# EAGLE board master manual (EAGLE 8.4.0)
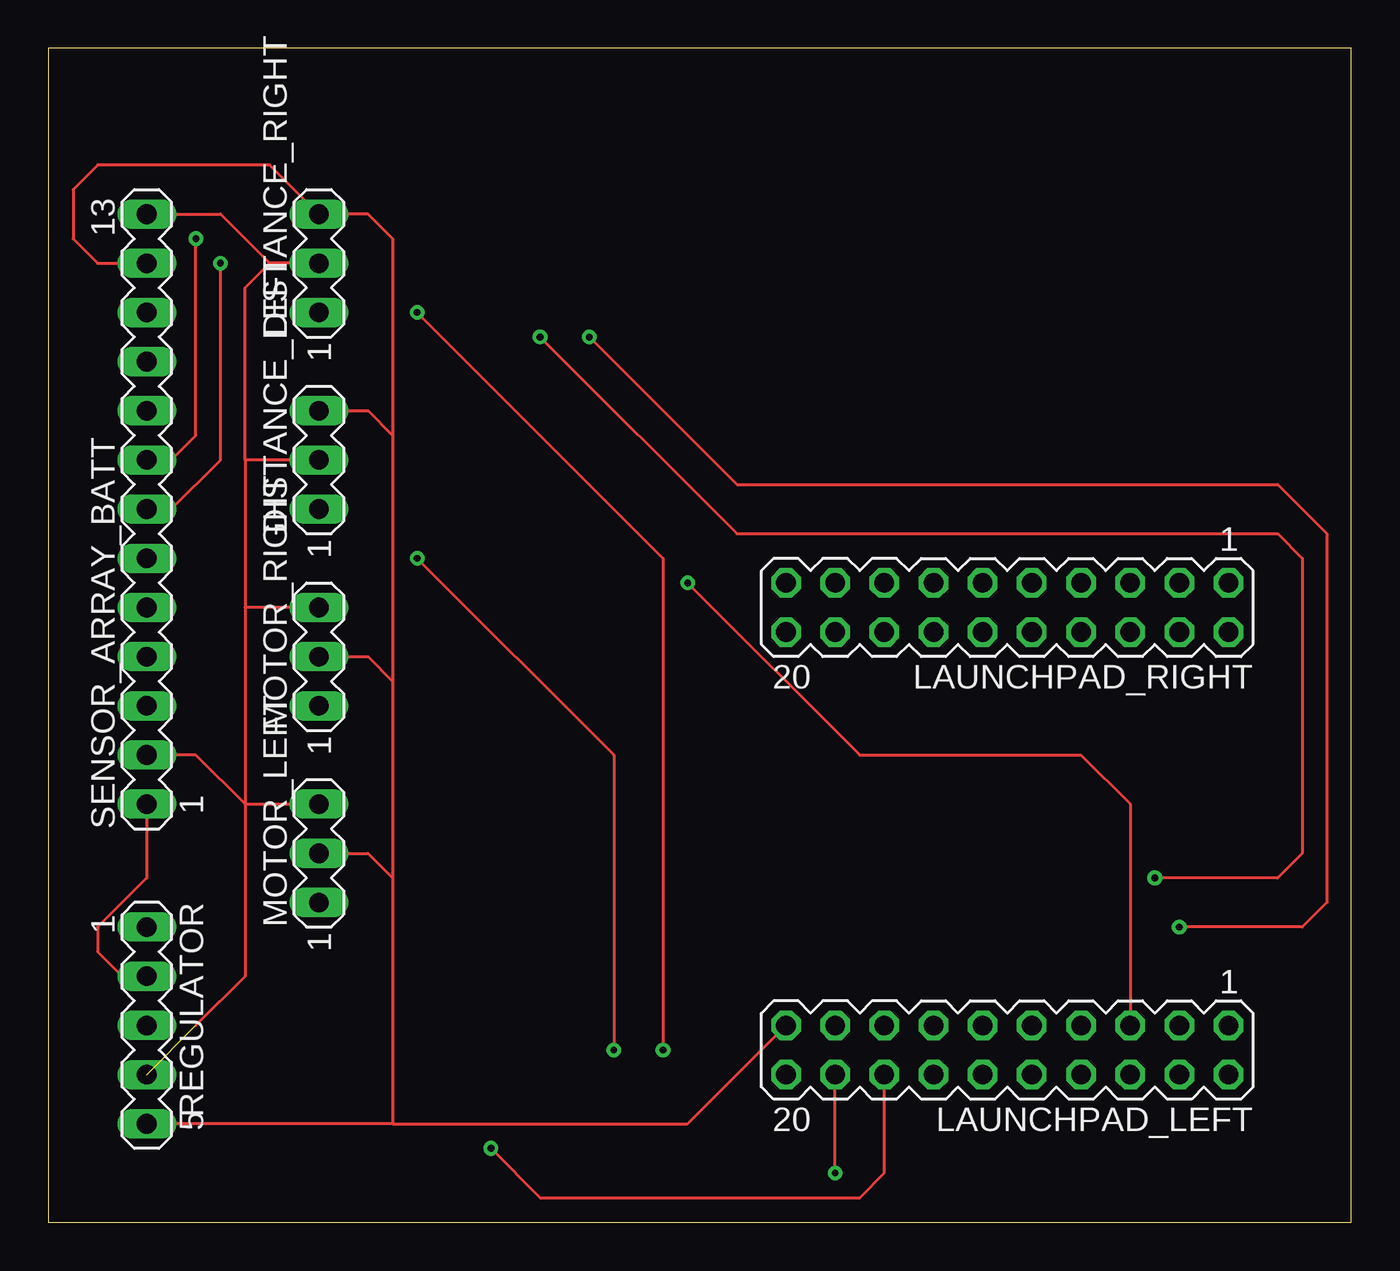
[diagram p0: board, top side]
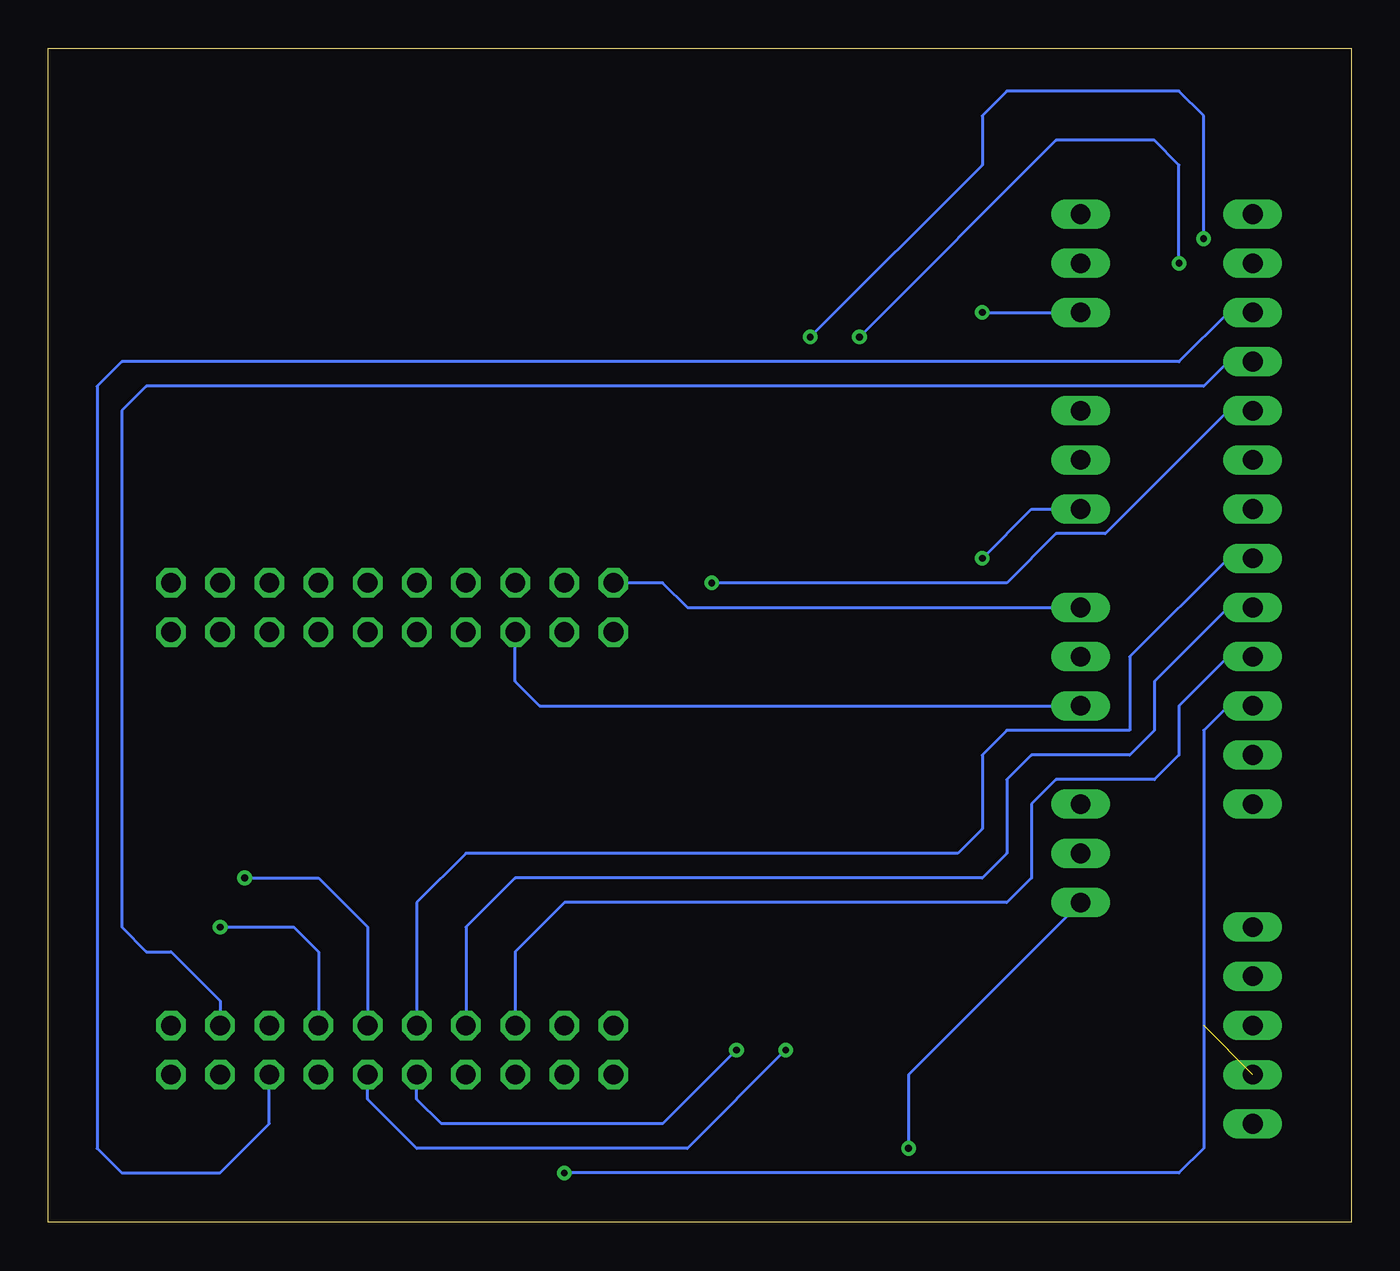
[diagram p1: board, bottom side, seen from below]

Size 67.29 x 60.63 mm. Coordinates in mm from the lower left corner, seen from the top.
Outline: 0,0 67.29,0 67.29,60.63 0,60.63 0,0
Copper layers (1*16): Top 0.035mm / dielectric 1.5mm / Bottom 0.035mm
Design rules "default": minimum track width 6mil, minimum drill 0.35mm, track to track 6mil, track to pad 6mil, pad to pad 6mil, via to via 6mil, smd to smd 6mil, copper to edge 40mil, drill to drill 6mil, minimum pad ring 10mil, minimum via ring 8mil, stop-mask expansion 4mil, vias tented up to drill 0mil, thermal gap 10mil

## Footprints (pad centres in the part's own frame; a part is rotated, then mirrored left to right if it is on the bottom)
MA03-1 = drill 1.016 long: 1 -2.54,0; 2 0,0; 3 2.54,0
MA10-2 = drill 1.016 octagon: 1 -11.43,-1.27; 2 -11.43,1.27; 3 -8.89,-1.27; 4 -8.89,1.27; 5 -6.35,-1.27; 6 -6.35,1.27; 7 -3.81,-1.27; 8 -3.81,1.27; 9 -1.27,-1.27; 10 -1.27,1.27; 11 1.27,-1.27; 12 1.27,1.27; 13 3.81,-1.27; 14 3.81,1.27; 15 6.35,-1.27; 16 6.35,1.27; 17 8.89,-1.27; 18 8.89,1.27; 19 11.43,-1.27; 20 11.43,1.27
MA05-1 = drill 1.016 long: 1 -5.08,0; 2 -2.54,0; 3 0,0; 4 2.54,0; 5 5.08,0
MA13-1 = drill 1.016 long: 1 -15.24,0; 2 -12.7,0; 3 -10.16,0; 4 -7.62,0; 5 -5.08,0; 6 -2.54,0; 7 0,0; 8 2.54,0; 9 5.08,0; 10 7.62,0; 11 10.16,0; 12 12.7,0; 13 15.24,0

## Placement (x,y rotation side)
DISTANCE_LEFT  [MA03-1]  13.97,39.37 90 top
DISTANCE_RIGHT  [MA03-1]  13.97,49.53 90 top
LAUNCHPAD_LEFT  [MA10-2]  49.53,8.89 180 top
LAUNCHPAD_RIGHT  [MA10-2]  49.53,31.75 180 top
MOTOR_LEFT  [MA03-1]  13.97,19.05 90 top
MOTOR_RIGHT  [MA03-1]  13.97,29.21 90 top
REGULATOR  [MA05-1]  5.08,10.16 270 top
SENSOR_ARRAY_BATT  [MA13-1]  5.08,36.83 90 top

## Library data of the parts
DISTANCE_LEFT DISTANCE_RIGHT LAUNCHPAD_LEFT LAUNCHPAD_RIGHT MOTOR_LEFT MOTOR_RIGHT REGULATOR = con-lstb; OC_FARNELL: unknown; OC_NEWARK: unknown
SENSOR_ARRAY_BATT = con-lstb; OC_FARNELL: unknown; OC_NEWARK: unknown; SPICEPREFIX: X

## Nets
+3.3V: LAUNCHPAD_LEFT.20
A2: LAUNCHPAD_RIGHT.1
A3: LAUNCHPAD_RIGHT.3
A4: LAUNCHPAD_RIGHT.5
A5: LAUNCHPAD_LEFT.6 SENSOR_ARRAY_BATT.11
A6: LAUNCHPAD_LEFT.4
A7: LAUNCHPAD_LEFT.2
B0: LAUNCHPAD_LEFT.16 MOTOR_LEFT.1
B1: LAUNCHPAD_LEFT.14
B2: LAUNCHPAD_RIGHT.17
B3: LAUNCHPAD_RIGHT.16 MOTOR_RIGHT.1
B4: LAUNCHPAD_LEFT.8
B5: LAUNCHPAD_LEFT.18 SENSOR_ARRAY_BATT.3
B6: LAUNCHPAD_RIGHT.7
B7: LAUNCHPAD_RIGHT.9
BLUE_LED: LAUNCHPAD_RIGHT.20
C4: LAUNCHPAD_RIGHT.14
C5: LAUNCHPAD_RIGHT.12
C6: LAUNCHPAD_RIGHT.10
C7: LAUNCHPAD_RIGHT.8
D0: LAUNCHPAD_LEFT.15 SENSOR_ARRAY_BATT.4
D1: LAUNCHPAD_LEFT.13 SENSOR_ARRAY_BATT.5
D2: LAUNCHPAD_LEFT.11 SENSOR_ARRAY_BATT.6
D3: LAUNCHPAD_LEFT.9 SENSOR_ARRAY_BATT.7
D6: LAUNCHPAD_RIGHT.6
DETECTION: LAUNCHPAD_RIGHT.4
E0: LAUNCHPAD_RIGHT.15
E1: LAUNCHPAD_LEFT.7 SENSOR_ARRAY_BATT.8
E2: LAUNCHPAD_LEFT.5 SENSOR_ARRAY_BATT.9
E3: LAUNCHPAD_LEFT.3 SENSOR_ARRAY_BATT.10
E4: DISTANCE_RIGHT.1 LAUNCHPAD_LEFT.12
E5: DISTANCE_LEFT.1 LAUNCHPAD_LEFT.10
EN: REGULATOR.1
GND: DISTANCE_LEFT.2 DISTANCE_RIGHT.2 LAUNCHPAD_RIGHT.19 MOTOR_LEFT.3 MOTOR_RIGHT.3 REGULATOR.4 SENSOR_ARRAY_BATT.2 SENSOR_ARRAY_BATT.13
GREEN_LED: LAUNCHPAD_RIGHT.18
PUSH1: LAUNCHPAD_RIGHT.2
PUSH2: LAUNCHPAD_RIGHT.13
RED_LED: LAUNCHPAD_LEFT.1
RESET: LAUNCHPAD_RIGHT.11
VBUS: DISTANCE_LEFT.3 DISTANCE_RIGHT.3 LAUNCHPAD_LEFT.19 MOTOR_LEFT.2 MOTOR_RIGHT.2 REGULATOR.5 SENSOR_ARRAY_BATT.12
VCC: REGULATOR.2 SENSOR_ARRAY_BATT.1

## Tracks (layer width: path | path; a pad name or v marks a point on that pad's centre or on a via)
A5
  Bottom 0.152: SENSOR_ARRAY_BATT.11 6.35,46.99 8.89,44.45 63.5,44.45 64.77,43.18 64.77,3.81 63.5,2.54 58.42,2.54 55.88,5.08 LAUNCHPAD_LEFT.6
B0  (via drill 0.35)
  Top 0.152: v22.86,3.81 25.4,1.27 41.91,1.27 43.18,2.54 LAUNCHPAD_LEFT.16
  Bottom 0.152: MOTOR_LEFT.1 22.86,7.62 v22.86,3.81
B3
  Bottom 0.152: LAUNCHPAD_RIGHT.16 43.18,27.94 41.91,26.67 MOTOR_RIGHT.1
B5  (via drill 0.35)
  Top 0.152: v40.64,2.54 LAUNCHPAD_LEFT.18
  Bottom 0.152: v40.64,2.54 8.89,2.54 7.62,3.81 7.62,25.4 6.35,26.67 SENSOR_ARRAY_BATT.3
D0
  Bottom 0.152: SENSOR_ARRAY_BATT.4 6.35,29.21 8.89,26.67 8.89,24.13 10.16,22.86 15.24,22.86 16.51,21.59 16.51,17.78 17.78,16.51 40.64,16.51 43.18,13.97 LAUNCHPAD_LEFT.15
D1
  Bottom 0.152: SENSOR_ARRAY_BATT.5 6.35,31.75 10.16,27.94 10.16,25.4 11.43,24.13 16.51,24.13 17.78,22.86 17.78,19.05 19.05,17.78 43.18,17.78 45.72,15.24 LAUNCHPAD_LEFT.13
D2
  Bottom 0.152: SENSOR_ARRAY_BATT.6 6.35,34.29 11.43,29.21 11.43,25.4 17.78,25.4 19.05,24.13 19.05,20.32 20.32,19.05 45.72,19.05 48.26,16.51 LAUNCHPAD_LEFT.11
D3  (via drill 0.35)
  Top 0.152: SENSOR_ARRAY_BATT.7 6.35,36.83 8.89,39.37 v8.89,49.53 | v25.4,45.72 35.56,35.56 63.5,35.56 64.77,34.29 64.77,19.05 63.5,17.78 v57.15,17.78
  Bottom 0.152: v8.89,49.53 8.89,54.61 10.16,55.88 15.24,55.88 v25.4,45.72 | v57.15,17.78 53.34,17.78 50.8,15.24 LAUNCHPAD_LEFT.9
E1  (via drill 0.35)
  Top 0.152: SENSOR_ARRAY_BATT.8 6.35,39.37 7.62,40.64 v7.62,50.8 | v58.42,15.24 64.77,15.24 66.04,16.51 66.04,35.56 63.5,38.1 35.56,38.1 v27.94,45.72
  Bottom 0.152: v27.94,45.72 19.05,54.61 19.05,57.15 17.78,58.42 8.89,58.42 7.62,57.15 v7.62,50.8 | v58.42,15.24 54.61,15.24 53.34,13.97 LAUNCHPAD_LEFT.7
E2  (via drill 0.35)
  Top 0.152: v33.02,33.02 41.91,24.13 53.34,24.13 55.88,21.59 LAUNCHPAD_LEFT.5
  Bottom 0.152: SENSOR_ARRAY_BATT.9 6.35,41.91 12.7,35.56 15.24,35.56 17.78,33.02 v33.02,33.02
E3
  Bottom 0.152: SENSOR_ARRAY_BATT.10 6.35,44.45 7.62,43.18 62.23,43.18 63.5,41.91 63.5,15.24 62.23,13.97 60.96,13.97 58.42,11.43 LAUNCHPAD_LEFT.3
E4  (via drill 0.35)
  Top 0.152: v19.05,46.99 31.75,34.29 v31.75,8.89
  Bottom 0.152: LAUNCHPAD_LEFT.12 48.26,6.35 46.99,5.08 35.56,5.08 v31.75,8.89 | v19.05,46.99 DISTANCE_RIGHT.1
E5  (via drill 0.35)
  Top 0.152: v29.21,8.89 29.21,24.13 v19.05,34.29
  Bottom 0.152: v19.05,34.29 16.51,36.83 DISTANCE_LEFT.1 | LAUNCHPAD_LEFT.10 50.8,6.35 48.26,3.81 34.29,3.81 v29.21,8.89
GND  (1 unrouted)
  Top 0.152: SENSOR_ARRAY_BATT.2 7.62,24.13 10.16,21.59 | 10.16,21.59 MOTOR_LEFT.3 | DISTANCE_RIGHT.2 11.43,49.53 | SENSOR_ARRAY_BATT.13 8.89,52.07 11.43,49.53 | 11.43,49.53 10.16,48.26 10.16,39.37 | 10.16,39.37 10.16,31.75 | 10.16,31.75 10.16,21.59 | MOTOR_RIGHT.3 10.16,31.75 | DISTANCE_LEFT.2 10.16,39.37 | 10.16,21.59 10.16,12.7 7.62,10.16
  Bottom 0.152: LAUNCHPAD_RIGHT.19 35.56,33.02 34.29,31.75 MOTOR_RIGHT.3
VBUS
  Top 0.152: 17.78,5.08 REGULATOR.5 | 17.78,5.08 33.02,5.08 LAUNCHPAD_LEFT.19 | MOTOR_LEFT.2 16.51,19.05 17.78,17.78 | 17.78,17.78 17.78,5.08 | MOTOR_RIGHT.2 16.51,29.21 17.78,27.94 | 17.78,27.94 17.78,17.78 | DISTANCE_LEFT.3 16.51,41.91 17.78,40.64 | 17.78,40.64 17.78,27.94 | 17.78,40.64 17.78,50.8 16.51,52.07 DISTANCE_RIGHT.3 11.43,54.61 2.54,54.61 1.27,53.34 1.27,50.8 2.54,49.53 SENSOR_ARRAY_BATT.12
VCC
  Top 0.152: SENSOR_ARRAY_BATT.1 5.08,17.78 2.54,15.24 2.54,13.97 3.81,12.7 REGULATOR.2